# EAGLE board water_height_monitoring_system v12 (EAGLE 9.7.0)
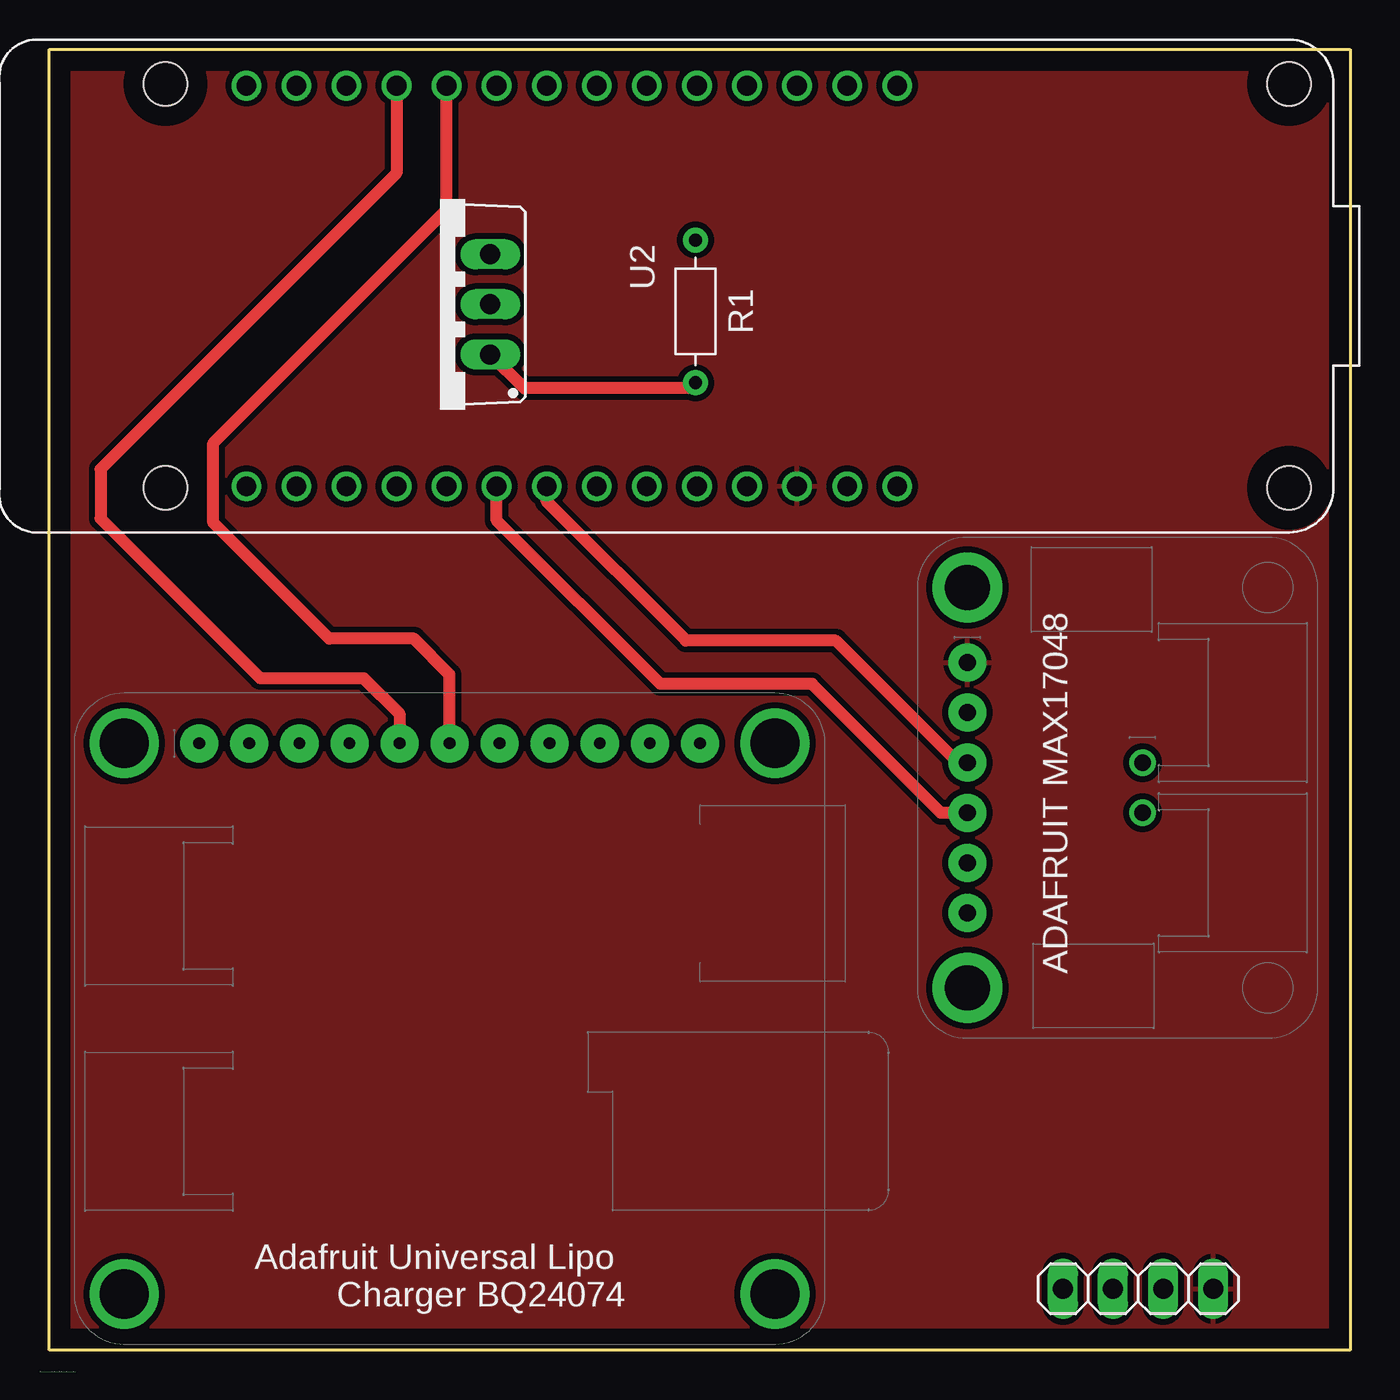
[diagram p0: board, top side]
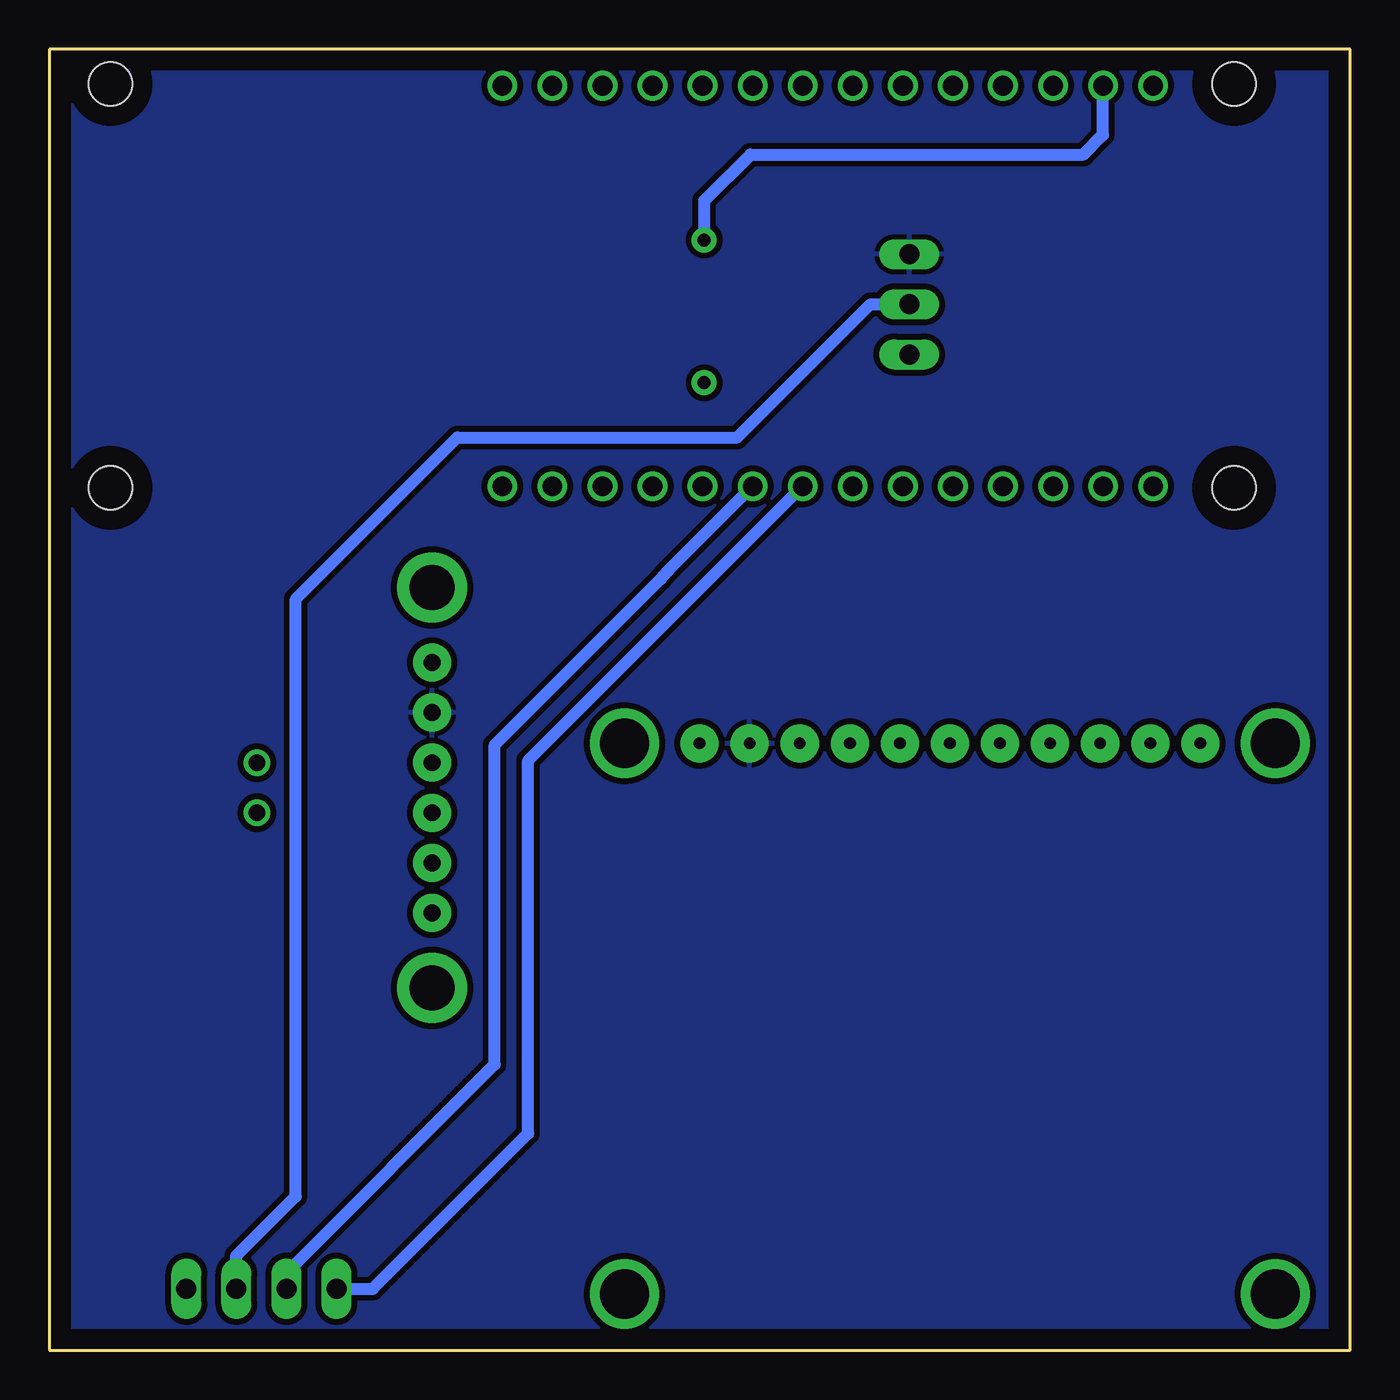
[diagram p1: board, bottom side, seen from below]

Size 66 x 66 mm. Coordinates in mm from the lower left corner, seen from the top.
Outline: 0,0 0,66 66,66 66,0 0,0
Copper layers (1*16): Top 0.035mm / dielectric 1.5mm / Bottom 0.035mm
Design rules "default *": minimum track width 0.6mm, minimum drill 0.35mm, track to track 0.3mm, track to pad 6mil, pad to pad 6mil, via to via 6mil, smd to smd 6mil, copper to edge 40mil, drill to drill 6mil, minimum pad ring 10mil, minimum via ring 8mil, stop-mask expansion 4mil, vias tented up to drill 0mil, thermal gap 10mil

## Footprints (pad centres in the part's own frame; a part is rotated, then mirrored left to right if it is on the bottom)
1X04 = drill 1.016 long: 1 -3.81,0; 2 -1.27,0; 3 1.27,0; 4 3.81,0
TO220BV = drill 1.016 long: D 0,-2.54; G -2.54,-2.54; S 2.54,-2.54
RESAD724W46L381D178B = drill 0.66 pad 1.26: 1 -3.62,0; 2 3.62,0
BOARD_ARDUINO_MKR_WAN_1310 = drill 1: J3_1 -10.16,11.715; J3_2 -10.16,9.175; J3_3 -10.16,6.635; J3_4 -10.16,4.095; J3_5 -10.16,1.555; J3_6 -10.16,-0.985; J3_7 -10.16,-3.525; J3_8 -10.16,-6.065; J3_9 -10.16,-8.605; J3_10 -10.16,-11.145; J3_11 -10.16,-13.685; J3_12 -10.16,-16.225; J3_13 -10.16,-18.765; J3_14 -10.16,-21.305; J5_1 10.16,-21.305; J5_2 10.16,-18.765; J5_3 10.16,-16.225; J5_4 10.16,-13.685; J5_5 10.16,-11.145; J5_6 10.16,-8.605; J5_7 10.16,-6.065; J5_8 10.16,-3.525; J5_9 10.16,-0.985; J5_10 10.16,1.555; J5_11 10.16,4.095; J5_12 10.16,6.635; J5_13 10.16,9.175; J5_14 10.16,11.715 | hole 2.2: 10.25,-25.4; -10.25,-25.4; -10.25,31.6; 10.25,31.6
BQ24074_MODULE = drill 0.6 pad 1.93: P0 6.35,2.54; P1 8.89,2.54; P2 11.43,2.54; P3 13.97,2.54; P4 16.51,2.54; P5 19.05,2.54; P6 21.59,2.54; P7 24.13,2.54; P8 26.67,2.54; P9 29.21,2.54; P10 31.75,2.54 | drill 2.5 pad 3.2: P15 2.54,30.48; P16 35.56,30.48; P17 35.56,2.54; P18 2.54,2.54
MAX17048 = drill 0.85 pad 1.93: P1 6.35,2.54; P2 8.89,2.54; P3 11.43,2.54; P4 13.97,2.54; P5 16.51,2.54; P6 19.05,2.54 | drill 0.85 pad 1.27: P7 11.43,11.43; P8 13.97,11.43 | drill 2.286 pad 3.556: P9 2.54,2.54; P10 22.86,2.54

## Placement (x,y rotation side)
JP2  PINHD-1X4  [1X04]  55.24,3.12 0 top
Q2  NMOSFET  [TO220BV]  19.83,53.06 90 top
R1  220  [RESAD724W46L381D178B]  32.78,52.7 270 top
U2  ARDUINO_MKR_WAN_1310  [BOARD_ARDUINO_MKR_WAN_1310]  31.3,53.99 270 top
U$2  ADAFRUIT_BQ24074  [BQ24074_MODULE]  39.36,33.33 180 top
U$3  ADAFRUIT_MAX17048  [MAX17048]  44.04,41.24 270 top

## Library data of the parts
JP2 = Connector; CATEGORY: Headers; DESCRIPTION: Header, Straight, 4 Position; MANUFACTURER: Generic; MPN: Generic; OPERATING_TEMPERATURE: Generic; PART_STATUS: Active; PITCH: 0.100" (2.54mm); ROHS_COMPLIANCE: Generic; SERIES: Generic; SUB-CATEGORY: Headers, Male Pins; TYPE: Board to Board or Cable, Unshrouded, Through Hole, Straight
Q2 = Transistor; CATEGORY: Transistor; SUB-CATEGORY: MOSFET; TYPE: N-Channel
R1 = Tinkercad; CATEGORY: Resistor; SUB-CATEGORY: Fixed
U2 = Library; AVAILABILITY: Not in stock; CHECK_PRICES: https://www.snapeda.com/parts/ARDUINO%20MKR%20WAN%201310/Arduino/view-part/?ref=eda; DESCRIPTION: Arduino Pro; LoRa; SAM D21; 5VDC; Flash: 256kB; SRAM: 32kB; MF: Arduino; MP: ARDUINO MKR WAN 1310; PACKAGE: None; PRICE: None; SNAPEDA_LINK: https://www.snapeda.com/parts/ARDUINO%20MKR%20WAN%201310/Arduino/view-part/?ref=snap
U$2 U$3 = Library

## Nets
+5V: U2.J5_14
BAT: U$3.P7
CHG: U2.J3_11 U$2.P6
DRAIN: JP2.3 Q2.D
GATE: R1.1 U2.J3_13
GND: Q2.S U$2.P1 U$3.P2
LIPO: U$2.P9
N$4: U2.J5_11
N$7: Q2.G R1.2
P$8.GND: U$3.P8
P$9.GND: U$2.P8
P$11.GND: U$2.P10
PGOOD: U2.J3_10 U$2.P5
RX: JP2.2 U2.J5_9
SCL: U2.J5_7 U$3.P3
SDA: U2.J5_6 U$3.P4
TX: JP2.1 U2.J5_8
VBUS: U$2.P0
VCC: JP2.4 U2.J5_12 U$3.P1
VIN: U2.J5_13

## Tracks (layer width: path | path; a pad name or v marks a point on that pad's centre or on a via)
CHG
  Top 0.6: U2.J3_11 17.62,59.72 2.6,44.7 2.6,42.2 10.7,34.1 15.96,34.1 17.77,32.29 U$2.P6
DRAIN
  Bottom 0.6: Q2.D 24.34,53.06 31.1,46.3 45.3,46.3 53.5,38.1 53.5,7.8 56.51,4.79 JP2.3
GATE
  Bottom 0.6: R1.1 32.78,58.32 30.43,60.65 13.54,60.65 12.54,61.65 U2.J3_13
GND
  pour Bottom: -2.97,-4.42 68.97,-4.42 69.92,-3.47 69.92,68.97 69.47,69.42 -0.97,69.42 -3.42,66.97 -3.42,-3.97
N$7
  Top 0.6: R1.2 32.78,48.88 32.7,48.8 24.09,48.8 Q2.G
PGOOD
  Top 0.6: U2.J3_10 20.16,57.86 8.32,46.02 8.32,41.98 14.2,36.1 18.5,36.1 20.31,34.29 U$2.P5
RX
  Bottom 0.6: U2.J5_9 34.6,39.55 34.99,39.11 43.4,30.7 43.4,14.5 53.97,3.93 JP2.2
SCL
  Top 0.6: U2.J5_7 25.24,43.06 32.3,36 39.9,36 46.09,29.82 46.08,29.81 U$3.P3
SDA
  Top 0.6: U2.J5_6 22.7,42.1 31,33.8 38.7,33.8 45.23,27.27 U$3.P4
TX
  Bottom 0.6: U2.J5_8 41.7,29.91 41.7,11 49.58,3.12 JP2.1
VCC
  pour Top: -3.47,-4.92 66.97,-4.92 68.92,-2.97 68.92,67.92 -2.32,67.92 -1.94,67.54 -1.92,67.52 -1.92,67.48 -1.94,67.46 -1.96,67.44 -1.98,67.42 -2.02,67.42 -2.04,67.44 -2.53,67.92 -3.93,67.92 -5.42,-2.97

## Text on the board
tPlace: /Users/satriamitrautama/Downloads/casa.bmp